# EAGLE board cat layout fnl3 (EAGLE 6.5.0)
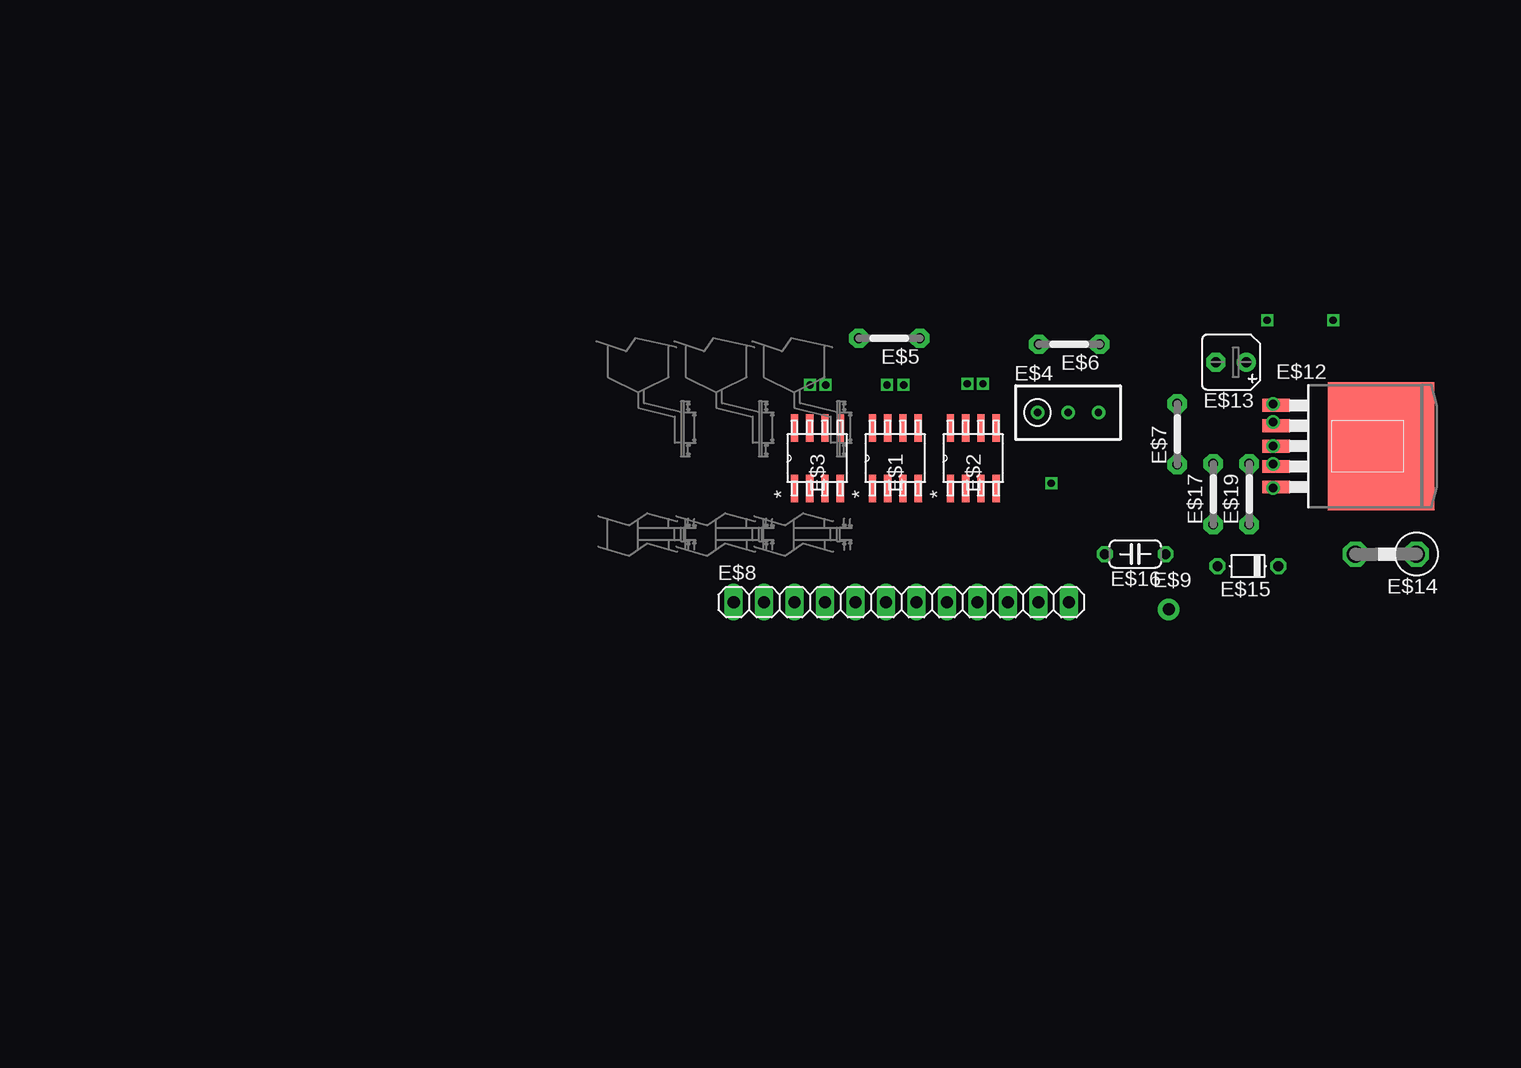
[diagram p0: board, top side]
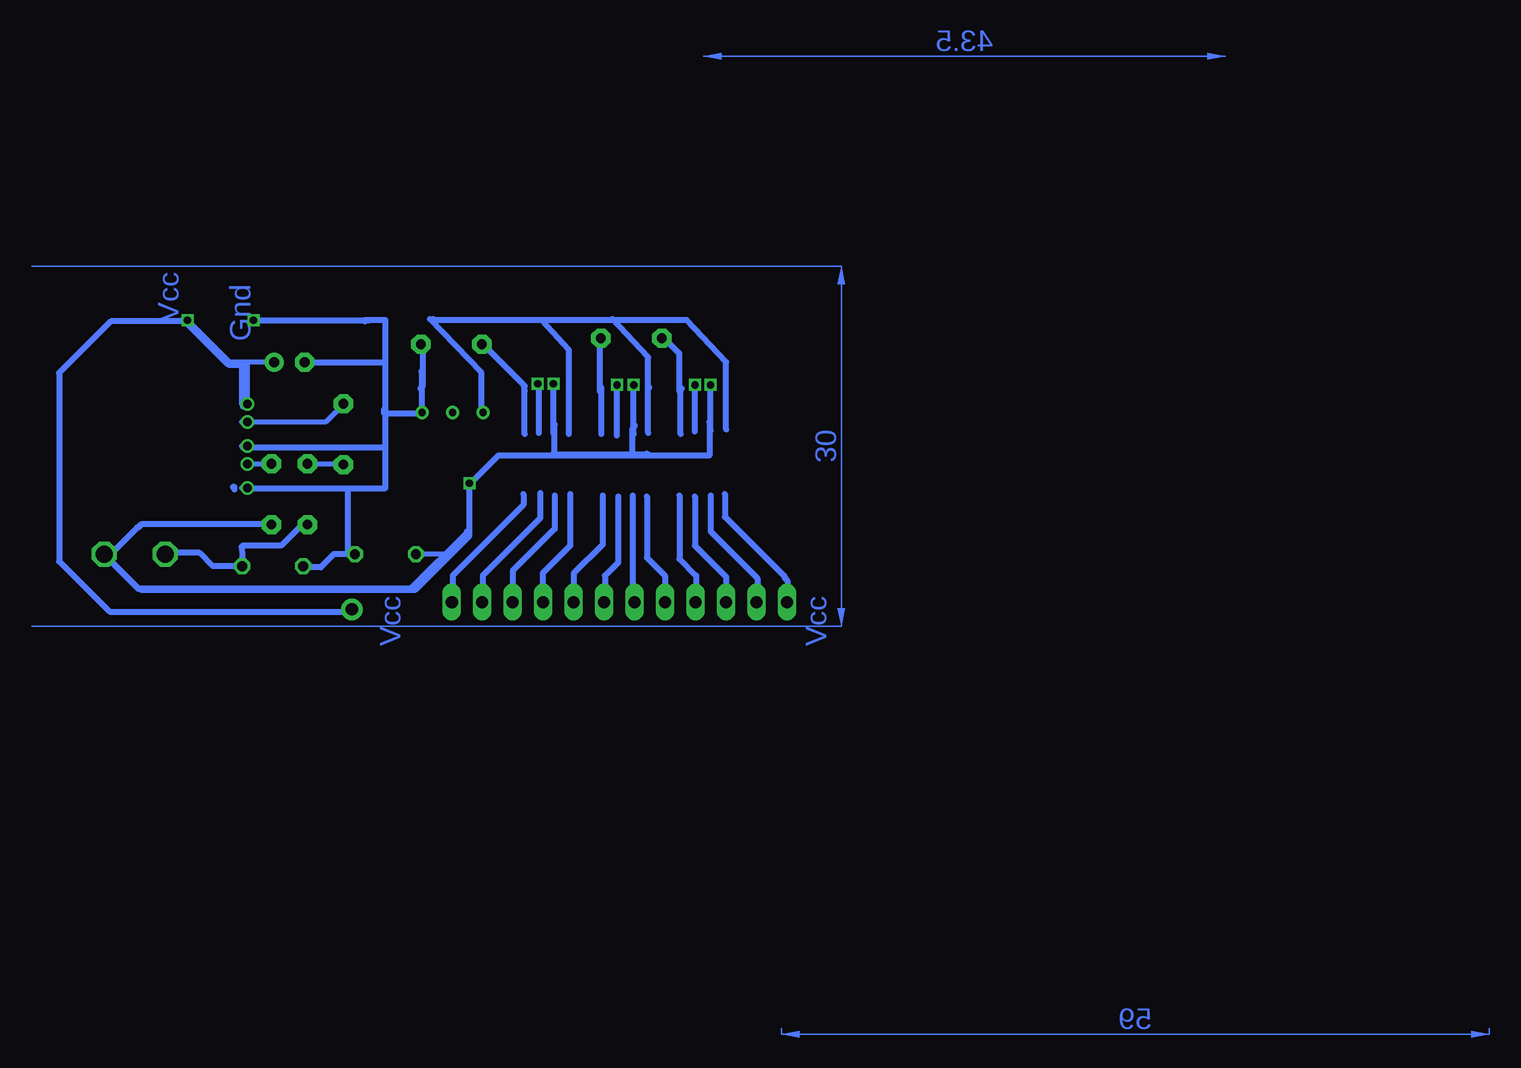
[diagram p1: board, bottom side, seen from below]

No outline drawn. Coordinates in mm, seen from the top.
Copper layers (1*16): Top 0.035mm / dielectric 1.5mm / Bottom 0.035mm
Design rules "default": minimum track width 10mil, minimum drill 24mil, track to track 8mil, track to pad 8mil, pad to pad 8mil, via to via 8mil, smd to smd 8mil, copper to edge 40mil, drill to drill 8mil, minimum pad ring 10mil, minimum via ring 8mil, stop-mask expansion 4mil, vias tented up to drill 0mil, thermal gap 10mil

## Footprints (pad centres in the part's own frame; a part is rotated, then mirrored left to right if it is on the bottom)
M08A-M = smd 2.286 x 0.61: 1 -2.515,1.905; 2 -2.515,0.635; 3 -2.515,-0.635; 4 -2.515,-1.905; 5 2.515,-1.905; 6 2.515,-0.635; 7 2.515,0.635; 8 2.515,1.905
RTRIM3296W = drill 0.61: 1 0,-2.54; 2 0,0; 3 0,2.54
05 = drill 0.813 pad 1.6 octagon: 1 -2.54,0; 2 2.54,0
1X12 = drill 1.016 long: 1 -13.97,0; 2 -11.43,0; 3 -8.89,0; 4 -6.35,0; 5 -3.81,0; 6 -1.27,0; 7 1.27,0; 8 3.81,0; 9 6.35,0; 10 8.89,0; 11 11.43,0; 12 13.97,0
1X01-CLEANBIG = drill 1.016 pad 1.778: 1 0,0
DDPAK5(Q) = smd 1.067 x 2.286: 1 -3.404,-8.763; 2 -1.702,-8.763; 3 0,-8.763; 4 1.702,-8.763; 5 3.404,-8.763 | smd 10.668 x 8.89: TAB 0,0
B45181A = drill 0.813 pad 1.6: + -1.27,0 | drill 0.813 pad 1.6 octagon: - 1.27,0
C1702-05 = drill 1.397 octagon: A 2.54,0; C -2.54,0
D-5 = drill 0.813 octagon: A 2.54,0; C -2.54,0
C050-024X044 = drill 0.813 octagon: 1 -2.54,0; 2 2.54,0

## Placement (x,y rotation side)
E$1  [M08A-M]  39,68.5 90 top
E$2  [M08A-M]  45.5,68.5 90 top
E$3  [M08A-M]  32.5,68.5 90 top
E$4  [RTRIM3296W]  53.4,72.3 270 top
E$5  [05]  38.5,78.5 180 top
E$6  [05]  53.5,78 180 top
E$7  [05]  62.5,70.5 90 top
E$8  [1X12]  39.5,56.5 0 top
E$9  [1X01-CLEANBIG]  61.8,55.9 0 top
E$12  [DDPAK5(Q)]  79.5,69.5 270 top
E$13  [B45181A]  67,76.5 180 top
E$14  [C1702-05]  79.9,60.5 180 top
E$15  [D-5]  68.4,59.5 180 top
E$16  [C050-024X044]  59,60.5 180 top
E$17  [05]  65.5,65.5 90 top
E$19  [05]  68.5,65.5 90 top

## Library data of the parts
E$1-E$3 = catlm
E$4 E$13-E$15 = ref-packages-longpad
E$5-E$7 E$17 E$19 = Misc
E$8 E$9 = adafruit
E$12 = PowerProducts
E$16 = PAsystem

## Tracks (layer width: path | path; a pad name or v marks a point on that pad's centre or on a via)
S$1
  Bottom 0.5: 51,72.3 51,75.6 55.3,80.1
S$2  (via drill 0.6)
  Bottom 0.406: 75.4,63 79.4,63 81.9,60.5 82.4,60.5 79.4,57.5 56.5,57.5 52,62
  Bottom 0.5: 52,62 v52,66.4
S$3
  Bottom 0.5: 30.7,65.5 30.7,63.6 25.7,58.6 25.7,58.5 25.5,58.3 25.5,56.3
S$4
  Bottom 0.5: 31.9,65.4 31.9,62.4 28,58.5 28,56.5
S$5
  Bottom 0.406: 54,60.5 56.5,60.5
S$6
  Bottom 0.5: 30.6,57.4 30.7,57.3
S$7
  Bottom 0.5: 33.2,65.3 33.2,61.2 30.6,58.6 30.6,56.6 30.5,56.5
S$8
  Bottom 0.5: 75.6,79.9 81.9,79.9 86.2,75.6 86.2,59.9 82,55.7 61.8,55.7 61.4,56.1
S$9
  Bottom 0.5: 34.5,65.4 34.5,60.1 33.1,58.7 33.1,56.6 33.2,56.5
S$10
  Bottom 0.5: 38.4,65.4 38.4,56.7 38.2,56.5
S$11
  Bottom 0.5: 39.6,65.3 39.6,59.8 40.7,58.7 40.7,56.5 40.8,56.4
S$12
  Bottom 0.5: 40.9,65.4 40.9,61.3 43.3,58.9 43.3,56.4
S$13
  Bottom 0.5: 43.6,65.5 43.6,61.2 45.9,58.9 45.9,56.4
S$14
  Bottom 0.5: 44.9,65.4 44.9,62.6 48.4,59.1 48.4,56.4
S$15
  Bottom 0.5: 46.1,65.6 46.1,63.5 50.9,58.7 50.9,56.4
S$16
  Bottom 0.5: 47.5,65.5 47.5,64.6 53.4,58.7 53.4,56.3 53.5,56.2
S$17
  Bottom 0.5: 37.2,65.3 37.2,60.2 35.7,58.7 35.7,56.5
S$18
  Bottom 0.5: 31.9,70.8 31.9,74.3
S$19  (via drill 0.7)
  Bottom 0.406: 71,69.5 v70.5,69.5
S$20
  Bottom 0.5: 33.2,70.7 33.2,74.4
S$21
  Bottom 0.5: 70.9,59.5 73.4,59.5 74.5,60.6 77.4,60.6 77.5,60.5
S$22
  Bottom 0.5: 70.9,69.4 59,69.4 59,69.5
S$23
  Bottom 0.5: 34.4,70.5 34.4,74.2 34.3,74.3
S$24
  Bottom 0.406: 62.5,68 65.5,68
S$25  (via drill 0.7)
  Bottom 0.406: 68.5,68 v70.5,68
S$26  (via drill 0.7)
  Bottom 0.406: 62.5,73 64,71.5 v70.5,71.5 71,71.5
S$27
  Bottom 0.5: 37.1,70.6 37.1,74.3 | 37.1,74.3 37,74.4 | 37.1,74.3 37.1,76.9 40.1,80.1
S$28
  Bottom 0.5: 38.3,70.5 38.3,74.3
S$29
  Bottom 0.5: 39.7,70.4 39.7,74.4
S$30
  Bottom 0.5: 41,70.5 41,74.4
S$31
  Bottom 0.5: 43.7,70.5 43.7,77.5 46,80 | 30.6,70.9 30.6,76.5 33.9,80 46,80 | 46,80 54.9,80 55,80.1
S$32
  Bottom 0.5: 45,70.6 45,74.5
S$33
  Bottom 0.5: 46.2,70.6 46.2,74.5
S$34
  Bottom 0.5: 47.4,70.5 47.4,74.1 47.4,74.5 47.5,74.6 51,78.1
S$35
  Bottom 0.5: 32,71.5 32,68.7 38.4,68.7 | 38.4,68.7 44.9,68.7 | 44.9,68.7 49.6,68.7 52.2,66.1 | 44.9,68.7 44.9,71.3 | 38.4,68.7 38.4,71 38.2,71.2
S$36
  Bottom 0.5: 37.2,68.9 37.1,68.8 44.9,68.8 45,68.9
S$37  (via drill 0.6)
  Bottom 0.5: v70,80 60.3,80
S$38
  Bottom 0.5: 55.9,78 55.9,74.5 56.1,74.3
S$39
  Bottom 0.5: 34.5,74.1 34.5,77.2 35.9,78.6
S$40
  Bottom 0.5: 41.1,74 41.1,78.3 41,78.4
S$41
  Bottom 0.406: 61.8,60.5 61.6,60.5 61.5,60.5
  Bottom 0.5: 61.8,60.5 62.1,60.5 62.1,65.9 | 61.6,60.5 63.3,60.5 64.4,59.4 66.1,59.4 66.2,59.5
S$42  (via drill 0.6, 0.7)
  Bottom 0.406: 76,80 v75.5,80 72,76.5 71,76.5 | 71,73 71,76.5 | 68,76.5 70.5,76.5 | 70.5,76.5 71,76.5 | v70.5,73 70.5,76.5
S$43
  Bottom 0.5: 56,75.7 56,72.2 59.1,72.2 59.1,72.6
S$44
  Bottom 0.5: 71.7,66.1 71.6,66.1 71.6,65.9
S$45  (via drill 0.7)
  Bottom 0.406: v70.5,66 70.9,66 71,66
  Bottom 0.5: 70.9,66 59,66 59,76.5 | 59,76.5 59,80 60.7,80 60.7,79.9 | 65.8,76.5 59,76.5
S$46
  Bottom 0.5: 75.6,80.1 75.8,80.1 75.8,80 72.1,76.3 70.7,76.3 70.7,73 70.9,72.8
S$47
  Bottom 0.5: 65.5,63 65.9,63 67.7,61.2 70.9,61.2 71,61.1 70.9,59.6 71,59.5
S$48
  Bottom 0.5: 68.6,63 79.3,63 79.6,62.7 79.7,62.7 82.2,60.2
S$51
  Bottom 0.5: 52.2,62.4 52.2,62.3 56.9,57.6 79.6,57.6 82.4,60.4
S$52  (via drill 0.6)
  other vias: 31.9,74.6
S$53  (via drill 0.6)
  other vias: 33.2,74.6
S$54  (via drill 0.6)
  other vias: 38.3,74.6
S$55  (via drill 0.6)
  other vias: 39.7,74.6
S$56  (via drill 0.6)
  other vias: 45,74.7
S$57  (via drill 0.6)
  other vias: 46.3,74.7
(copper drawn outside any net)
  shapes: Bottom area x3

## Text on the board
Bottom: Vcc | Gnd | Vcc | Vcc